# EAGLE board tm4cShield_eStop_v1.0 (EAGLE 7.6.0)
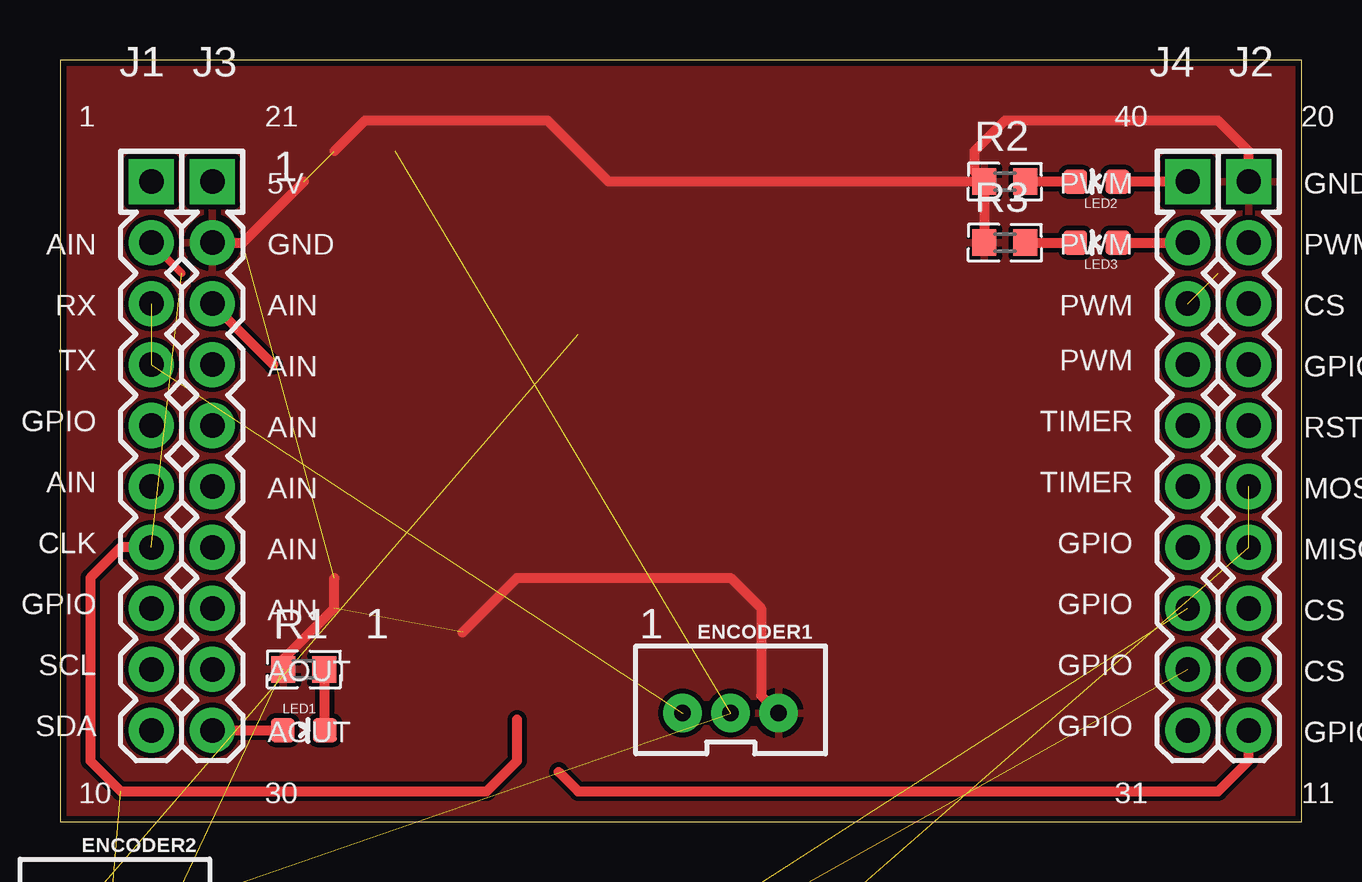
[diagram p0: board, top side]
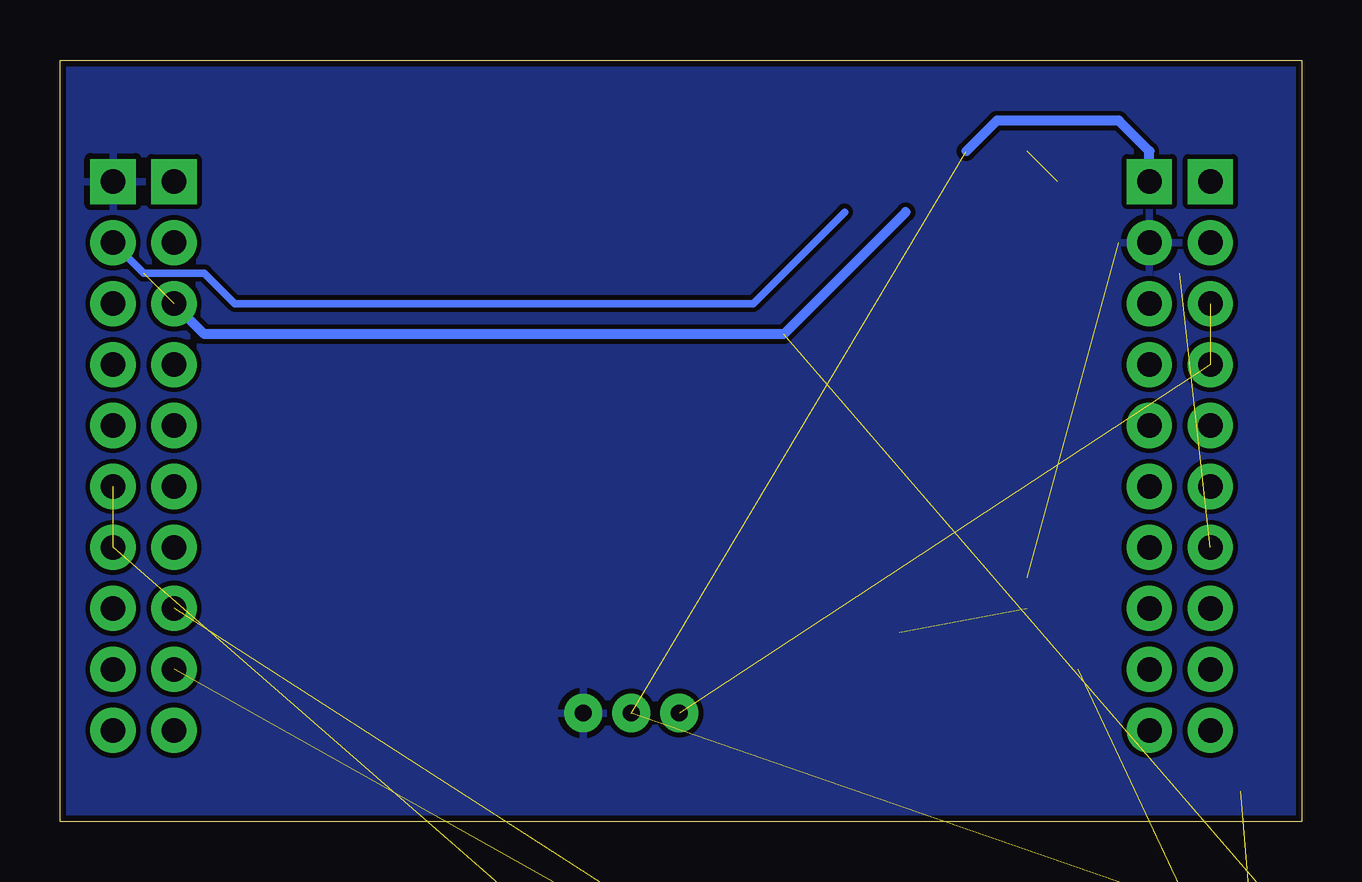
[diagram p1: board, bottom side, seen from below]

Size 51.74 x 31.74 mm. Coordinates in mm from the lower left corner, seen from the top.
Outline: 0,0 51.74,0 51.74,31.74 0,31.74 0,0
Copper layers (1*16): Top 0.035mm / dielectric 1.5mm / Bottom 0.035mm
Design rules "SparkFun": minimum track width 8mil, minimum drill 20mil, track to track 8mil, track to pad 8mil, pad to pad 8mil, via to via 8mil, smd to smd 8mil, copper to edge 10mil, drill to drill 8mil, minimum pad ring 12mil, minimum via ring 10mil, stop-mask expansion 4mil, vias tented up to drill 25mil, thermal gap 10mil

## Footprints (pad centres in the part's own frame; a part is rotated, then mirrored left to right if it is on the bottom)
4X10-BOOSTERPACK = drill 1.016 pad 1.88 square: 1 0,10.16; 20 45.72,10.16; 21 2.54,10.16; 40 43.18,10.16 | drill 1.016 pad 1.88: 2 0,7.62; 3 0,5.08; 4 0,2.54; 5 0,0; 6 0,-2.54; 7 0,-5.08; 8 0,-7.62; 9 0,-10.16; 10 0,-12.7; 11 45.72,-12.7; 12 45.72,-10.16; 13 45.72,-7.62; 14 45.72,-5.08; 15 45.72,-2.54; 16 45.72,0; 17 45.72,2.54; 18 45.72,5.08; 19 45.72,7.62; 22 2.54,7.62; 23 2.54,5.08; 24 2.54,2.54; 25 2.54,0; 26 2.54,-2.54; 27 2.54,-5.08; 28 2.54,-7.62; 29 2.54,-10.16; 30 2.54,-12.7; 31 43.18,-12.7; 32 43.18,-10.16; 33 43.18,-7.62; 34 43.18,-5.08; 35 43.18,-2.54; 36 43.18,0; 37 43.18,2.54; 38 43.18,5.08; 39 43.18,7.62
JST-3-PTH-VERT = drill 0.7 pad 1.6: 1 -2,-0.55; 2 0,-0.55; 3 2,-0.55
JST-4-PTH-VERT = drill 0.7 pad 1.6: 1 -3,-0.55; 2 -1,-0.55; 3 1,-0.55; 4 3,-0.55
LED-0603 = smd 1 x 1: A 0,-0.877; C 0,0.877
RESC0603 = smd 1 x 1.1: 1 -0.85,0; 2 0.85,0

## Placement (x,y rotation side)
A1  [4X10-BOOSTERPACK]  3.81,16.51 0 top
ENCODER1  [JST-3-PTH-VERT]  27.94,5.08 0 top
ENCODER2  [JST-3-PTH-VERT]  2.29,-3.81 0 top  (outside the outline)
ENCODER3  [JST-3-PTH-VERT]  2.29,-25.15 0 top  (outside the outline)
ENCODER4  [JST-3-PTH-VERT]  2.29,-30.99 0 top  (outside the outline)
INHIBITI/O  [JST-4-PTH-VERT]  3.3,-19.3 0 top  (outside the outline)
LED1  [LED-0603]  10.16,3.81 270 top
LED2  [LED-0603]  43.18,26.67 90 top
LED3  [LED-0603]  43.18,24.13 90 top
R1  [RESC0603]  10.16,6.35 0 top
R2  [RESC0603]  39.37,26.67 0 top
R3  [RESC0603]  39.37,24.13 0 top

## Library data of the parts
A1 LED1-LED3 R1-R3 = EAGLE_BoosterPack_Library
ENCODER1-ENCODER4 = SparkFun-Connectors; PROD_ID: CONN-13230
INHIBITI/O = SparkFun-Connectors; PROD_ID: CONN-13251

## Nets
3.3V: A1.1
5V: A1.21 ENCODER1.2 ENCODER2.2 ENCODER3.2 ENCODER4.2
GND: A1.20 A1.22 ENCODER1.3 ENCODER2.3 ENCODER3.3 ENCODER4.3 R1.1 R2.1 R3.1
N$1: INHIBITI/O.4
N$2: LED1.C R1.2
N$3: INHIBITI/O.3
N$6: LED2.C R2.2
N$7: LED3.C R3.2
PA2: A1.11
PA3: A1.12
PA4: A1.13
PA5: A1.8
PA6: A1.9
PA7: A1.10
PB0: A1.3 A1.4 ENCODER1.1
PB2: A1.19 A1.38 ENCODER2.1
PB4: A1.2 A1.7 ENCODER3.1
PB7: A1.14 A1.15 ENCODER4.1
PC4: A1.37
PC5: A1.36
PC6: A1.35
PC7: A1.34
PD0: A1.23
PD1: A1.24
PD2: A1.25
PD3: A1.26
PD6: A1.33 INHIBITI/O.2
PD7: A1.32 INHIBITI/O.1
PE0: A1.18
PE1: A1.27
PE2: A1.28
PE3: A1.29
PE4: A1.5
PE5: A1.6
PF0: A1.17
PF1: A1.30 LED1.A
PF2: A1.40 LED2.A
PF3: A1.39 LED3.A
PF4: A1.31
RST: A1.16

## Tracks (layer width: path | path; a pad name or v marks a point on that pad's centre or on a via)
5V  (4 unrouted)
  Bottom 0.406: A1.21 6.35,27.94 7.62,29.21 12.7,29.21 13.97,27.94
GND  (6 unrouted)
  Top 0.406: A1.22 7.62,24.13 10.16,26.67 | R1.1 9.31,6.77 11.43,8.89 11.43,10.16 | R2.1 R3.1 | R2.1 22.86,26.67 20.32,29.21 12.7,29.21 11.43,27.94 | 16.78,7.89 19.05,10.16 27.94,10.16 29.21,8.89 29.21,5.26 ENCODER1.3 | A1.20 49.53,27.94 48.26,29.21 39.37,29.21 38.1,27.94 38.1,27.09 R2.1
  pour Top: 0,31.75 51.82,31.75 51.82,24.64 51.82,0 0,0 0,1.78
  pour Bottom: 0,31.75 51.82,31.75 51.82,0 0,0
N$2
  Top 0.406: LED1.C 11.04,6.32 R1.2
N$6
  Top 0.406: LED2.C R2.2
N$7
  Top 0.406: R3.2 LED3.C
PA2
  Top 0.406: 20.78,2.08 21.59,1.27 48.26,1.27 49.53,2.54 A1.11
PB0  (2 unrouted)
PB2  (2 unrouted)
  Bottom 0.305: 19.05,25.4 22.86,21.59 44.45,21.59 45.72,22.86 48.26,22.86 A1.19
  Bottom 0.406: 16.51,25.4 21.59,20.32 45.72,20.32 A1.38
PB4  (2 unrouted)
  Top 0.305: A1.2 5.08,22.86
  Top 0.406: A1.7 2.54,11.43 1.27,10.16 1.27,2.54 2.54,1.27 17.78,1.27 19.05,2.54 19.05,4.26
PB7  (2 unrouted)
PD0
  Top 0.406: 8.89,19.05 A1.23
PD6  (1 unrouted)
PD7  (1 unrouted)
PF1
  Top 0.406: A1.30 LED1.A
PF2
  Top 0.406: A1.40 LED2.A
PF3
  Top 0.406: LED3.A A1.39

## Text on the board
tPlace: 1 | 1 | 1